# Altium PCB turbidity.PcbDoc
Units mm, origin at the board's own origin, x right, y up, seen from the top; angles counter-clockwise.
Board outline 28 x 28 mm, 2 copper layers (Top Layer, Bottom Layer); 9 components, 7 nets, 24 pads, 10 vias.
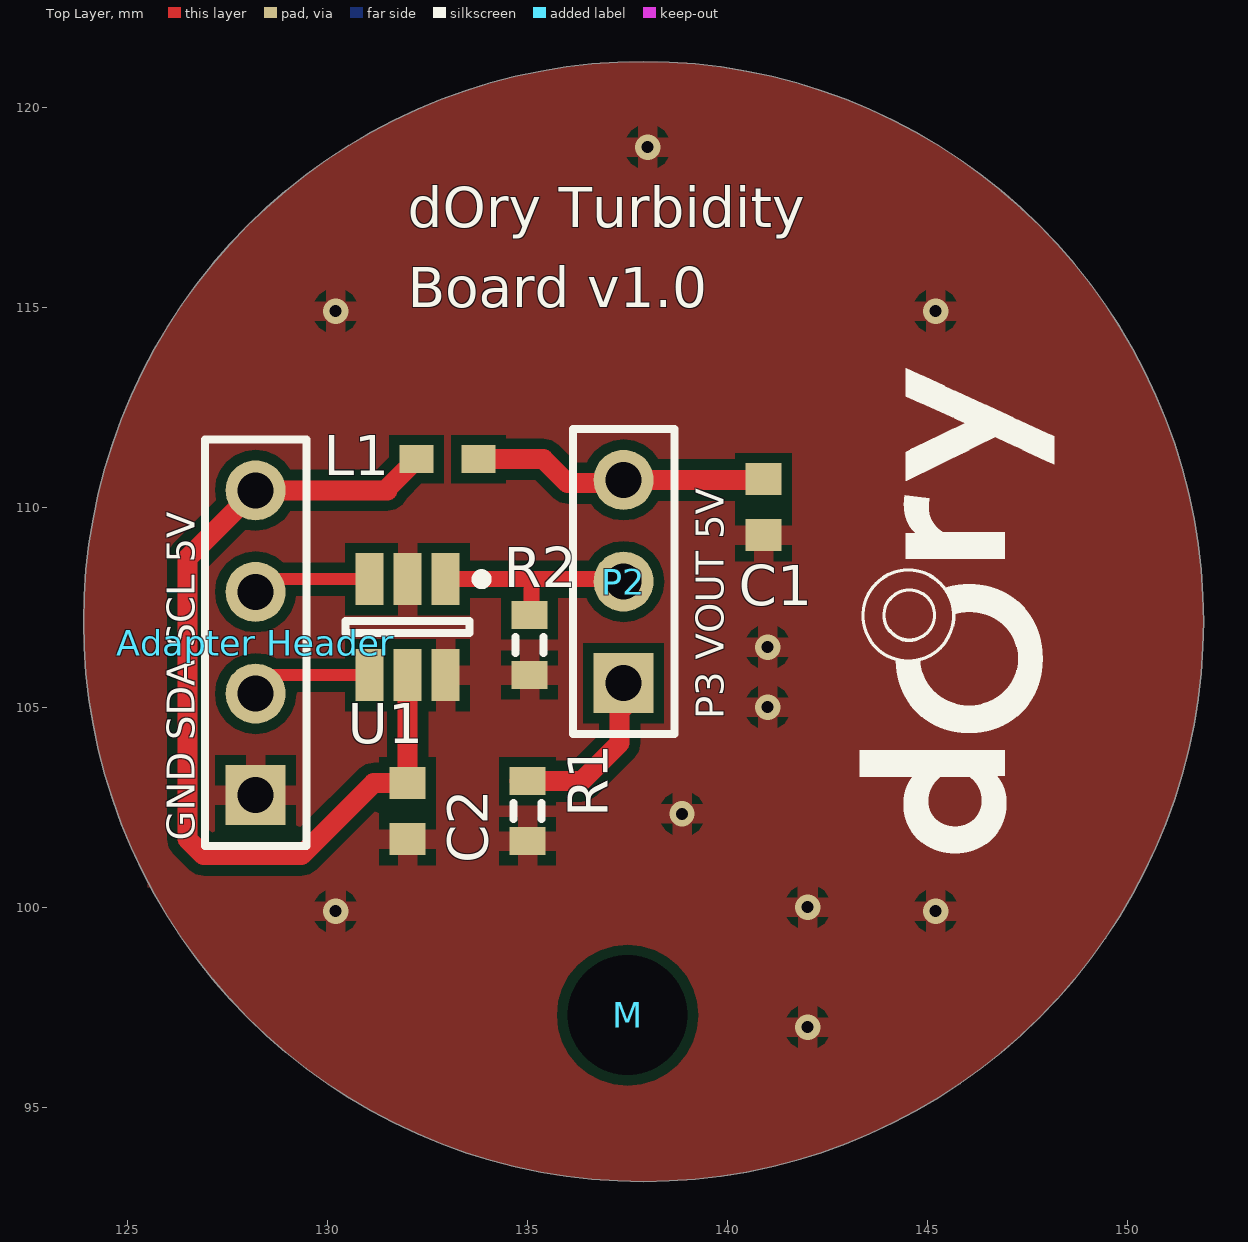
[diagram p0: Top Layer view]
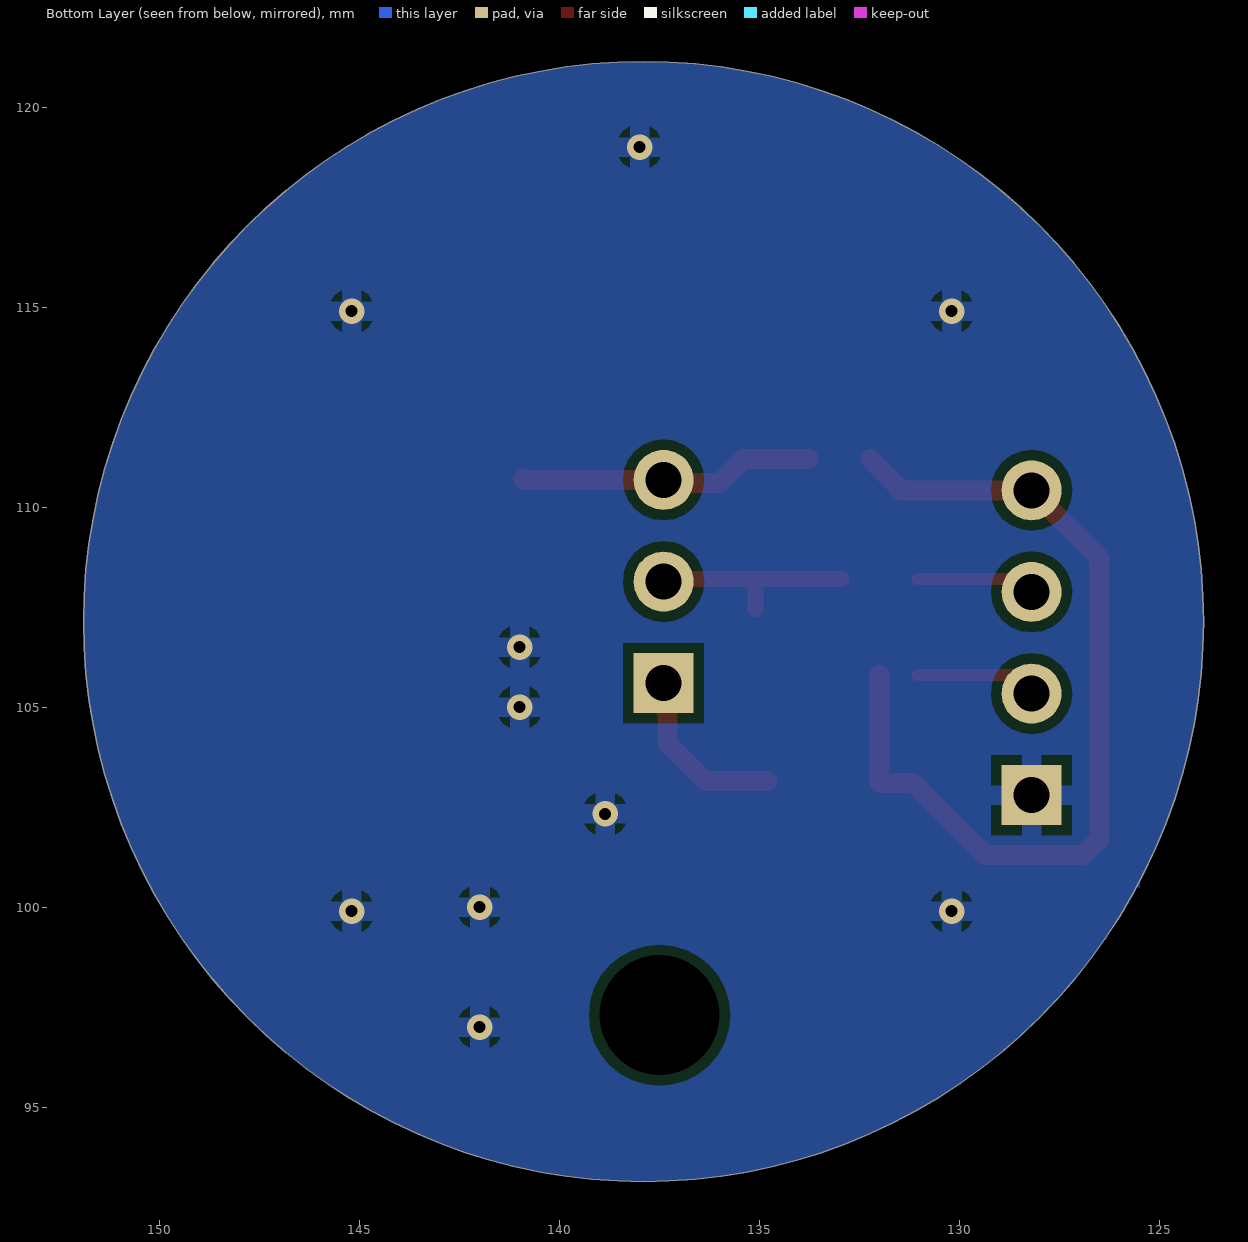
[diagram p1: Bottom Layer view, seen from below]

## Layer stack, top to bottom
Top Solder: solder mask 0.0102, Solder Resist, Dk 3.5
Top Layer: signal copper 0.0356
Dielectric 1: dielectric 0.32, FR-4, Dk 4.8
Bottom Layer: signal copper 0.0356
Bottom Solder: solder mask 0.0102, Solder Resist, Dk 3.5

## Board outline
123.9,107.14 ccw(c137.9,107.14) 137.9,93.14 ccw(c137.9,107.14) 151.9,107.14 ccw(c137.9,107.14) 137.9,121.14 ccw(c137.9,107.14)

## Design rules (kind name [scope] priority, off if disabled: settings)
Clearance [All] p1: gap=0.254
MinimumSolderMaskSliver [All] p1: minsoldermaskwidth=0.13
PlaneConnect [All] p1: planeconnectstyle=Relief reliefexpansion=0.508 reliefentries=4 reliefconductorwidth=0.3 reliefairgap=0.254
PolygonConnect [All] p1: connectstyle=Relief reliefconductorwidth=0.5 reliefentries=4 polygonreliefangle="90 Angle" airgapwidth=0.254
RoutingVias [All] p1: holewidth=0.5 width=0 viastyle="Through Hole" minholewidth=0.5 minwidth=0.8 maxholewidth=6.35 maxwidth=7
SilkToSilkClearance [All] p1: silktosilkclearance=0
SilkToSolderMaskClearance [IsPad] p1: minsilkscreentomaskgap=0.13 clearancetoexposedcopper=TRUE
SolderMaskExpansion [All] p1: expansion=0.075
Width Width_Powerline [(InNet('+5') OR InNet('GND'))] p1: maxlimit=0.5 minlimit=0.25 preferedwidth=0.5 minimp=50.000000 maximp=50.000000 favimp=50.000000
Width [All] p2: maxlimit=0.5 minlimit=0.2 preferedwidth=0.25 minimp=50.000000 maximp=50.000000 favimp=50.000000
25 further rules are at their usual default settings.

## Components (designator, comment, footprint, x,y, rotation, side; value= is the part's Value field where it differs from the comment)
"Adapter Header" "Adapter Header" "Adapter Header" 128.2,102.8 r90 top
C1 "Cap Semi" 1608[0603] 140.9,110 r90 top
C2 "Cap Semi" 1608[0603] 132,102.4 r90 top
L1 "742861210" SMD-0603 133,111.2 r180 top
M "mounting hole" MOUNTING_HOLE 137.5,97.3 r90 top
P2 "Turbidity Header" "TURBIDITY HEADER" 137.4,105.6 r90 top
R1 "Res3" J1-0603 135,102.4 r90 top
R2 "Res3" J1-0603 135.05,106.554 r90 top
U1 "MCP3425A0T-E/CH" SOT-23-CH6_M 132,107 r270 top

## Footprints (in the part's own frame and the unit in brackets; to place one, negate y for a bottom-side part, rotate by r counter-clockwise, add the part's x,y. Pads: shape width x height; smd on the part's side, far side on the other; paste and mask are expansions set on the pad)
1608[0603] [mm] "Chip Capacitor, Body 1.6x0.8mm, IPC High Density"
  rect 0.8x0.9 smd: 1(-0.7,0) 2(0.7,0)
  body extent -0.87,-0.48 0.87,0.48, height 1.3
"Adapter Header" [mm] "Connector; Header; 4 Position"
  rect 1.5x1.5 hole 0.9: 1(0,0)
  round 1.5 hole 0.9: 2(2.54,0) 3(5.08,0) 4(7.62,0)
  silkscreen extent -1.27,-1.27 8.89,1.27
J1-0603 [mm] "Chip Resistor, Body 1.6x0.8mm, IPC High Density"
  rect 0.7x0.9 smd: 1(-0.75,0) 2(0.75,0)
  silkscreen extent -0.2,-0.35 0.2,0.35, body extent -0.85,-0.48 0.85,0.48, height 0.9
MOUNTING_HOLE [mil]
  round 60 hole 118.11: 0(0,0)
SMD-0603 [mm] "Chip Inductor, 2-Leads, Body 1.6x0.8mm"
  rect 0.85x0.7 smd: 1(-0.775,0) 2(0.775,0)
  body extent -0.8,-0.4 0.8,0.4, height 0.79
SOT-23-CH6_M [mm] "SOT23, 6-Leads, Body 2.9x1.7mm, Pitch 0.95mm, Lead Span 2.8mm, IPC Low Density"
  rect 1.3x0.7 smd: 1(-1.2,0.95) 2(-1.2,0) 3(-1.2,-0.95) 4(1.2,-0.95) 5(1.2,0) 6(1.2,0.95)
  silkscreen extent -1.32,-1.55 0.15,1.98, body extent -0.9,-1.55 0.9,1.55, height 1.45
"TURBIDITY HEADER" [mm] "Connector; Header; 3 Position"
  rect 1.5x1.5 hole 0.9: 1(0,0)
  round 1.5 hole 0.9: 2(2.54,0) 3(5.08,0)
  silkscreen extent -1.27,-1.27 6.35,1.27

## Part data
"Adapter Header": "Header, 4-Pin"
C1 C2: "Capacitor (Semiconductor SIM Model)"
L1: library part CMP-0220-00121-1, "SMD EMI Suppression Ferrite Bead WE-CBF HF, Z = 1000 Ohm"
M: library part mounting_hole
P2: "Header, 3-Pin"
R1 R2: "Resistor"
U1: library part CMP-0188-00774-2, "16-Bit Analog-to-Digital Converter with I2C Interface and On-Board Reference, 6-Pin SOT-23, Extended Temperature, Tape and Reel"

## Via types
v1: diameter 0.635, hole 0.3, Top Layer to Bottom Layer, 10 vias

## Nets (pads, with @x,y where several pads share a name; then routed paths per layer and width w, separated by ;. In a path a pad name is that pad's centre, name@x,y a point inside that pad or via, vN(x,y) a via of type N, cw(c..) or ccw(c..) an arc to the next point about the centre after c; other vN are vias at no path point)
+5: "Adapter Header.4" C2.2 L1.2 U1.5 | length 22.9
  Top Layer w0.5: U1.5 C2.2 131.15,103.1 129.35,101.3 126.9,101.3 126.5,101.7 126.5,108.72 128.2,110.42 131.5,110.42 131.5,110.475 L1.2
GND: "Adapter Header.1" C1.1 C2.1 R1.1 R2.1 U1.2 U1.6
  other v1: 142,97 130.2,99.9 145.2,99.9 142,100 138.862,102.332 141,105 141,106.5 130.2,114.9 145.2,114.9 138,119
NetC1_2: C1.2 L1.1 P2.3 | length 7.4
  Top Layer w0.5: L1.1 135.4,111.2 136,110.6 137.32,110.6 P2.3 140.88,110.68 C1.2
NetP2_1: P2.1 R1.2 | length 4.4
  Top Layer w0.5: R1.2@134.8,103.15 136.35,103.15 137.3,104.1 137.3,104.9 P2.1@137.8,105.4
SCL: "Adapter Header.3" U1.3 | length 3
  Top Layer w0.25: 128.2,107.88 128.52,108.2
  Top Layer w0.3: 128.52,108.2 U1.3
SDA: "Adapter Header.2" U1.4 | length 3
  Top Layer w0.25: 128.2,105.34 128.66,105.8
  Top Layer w0.3: 128.66,105.8 U1.4
VMES: P2.2 R2.2 U1.1 | length 5
  Top Layer w0.4: U1.1 137.24,108.2 P2.2@137.4,108.04 ; R2.2@135.1,107.45 135.1,107.94
pads on no net: M.0

## Polygon pours and split planes (outlines as drawn)
GND on Top Layer "Top Layer-No Net" (solid, remove dead copper, pour order 10): 125.5,112.5 142.5,112.5 142.5,100.5 125.5,100.5
GND on Top Layer "top_GND" (solid, pour order 9): 123.9,107.14 ccw(c137.9,107.14) 137.9,93.14 ccw(c137.9,107.14) 151.9,107.14 ccw(c137.9,107.14) 137.9,121.14 ccw(c137.9,107.14)
GND on Bottom Layer "Top Layer-No Net" (solid, remove dead copper, pour order 11): 125.5,112.5 142.5,112.5 142.5,100.5 125.5,100.5
GND on Bottom Layer "btm_GND" (solid, pour order 12): 123.9,107.14 ccw(c137.9,107.14) 137.9,93.14 ccw(c137.9,107.14) 151.9,107.14 ccw(c137.9,107.14) 137.9,121.14 ccw(c137.9,107.14)

## Silkscreen, mask and mechanical layers (free items; w line width, h text height)
Top Overlay:
  drawing of 1978 lines, arcs and shapes, not listed
  text "dOry Turbidity" at 132,117 h1
  text "Board v1.0" at 132,115 h1
Mechanical 2:
  circle w0.254: c137.9,107.14 r14

## Text inside footprints (layer, text, board x,y; h text height)
"Adapter Header": Top Overlay "GND SDA SCL 5V" at 126.676,101.657 h0.7 r90
P2: Top Overlay "P3 VOUT 5V" at 139.9,104.7 h0.7 r90